# Altium PCB Heater 020305.PcbDoc
Units mm, origin at the board's own origin, x right, y up, seen from the top; angles counter-clockwise.
Board outline 154.43 x 102.87 mm, 2 copper layers (Top Layer, Bottom Layer); 49 components, 12 nets, 102 pads, 137 vias.
Unrouted connection lines stored in the file: 1.
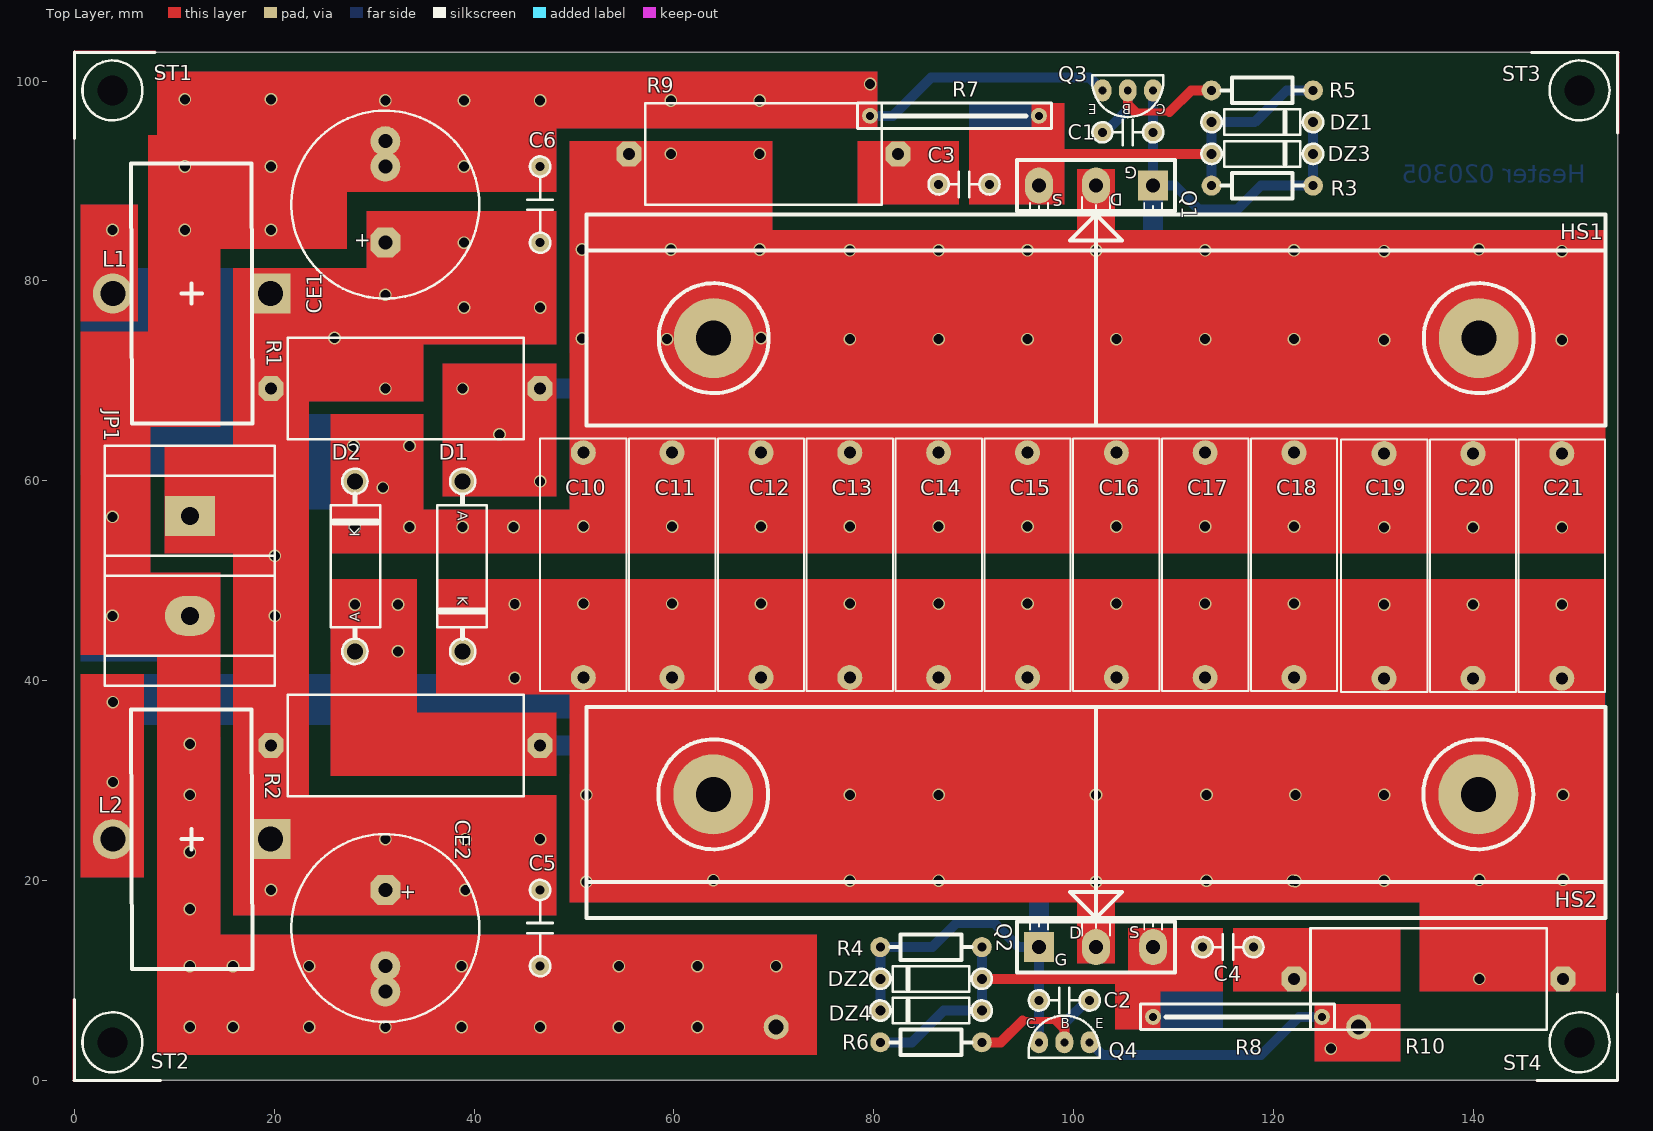
[diagram p0: Top Layer view]
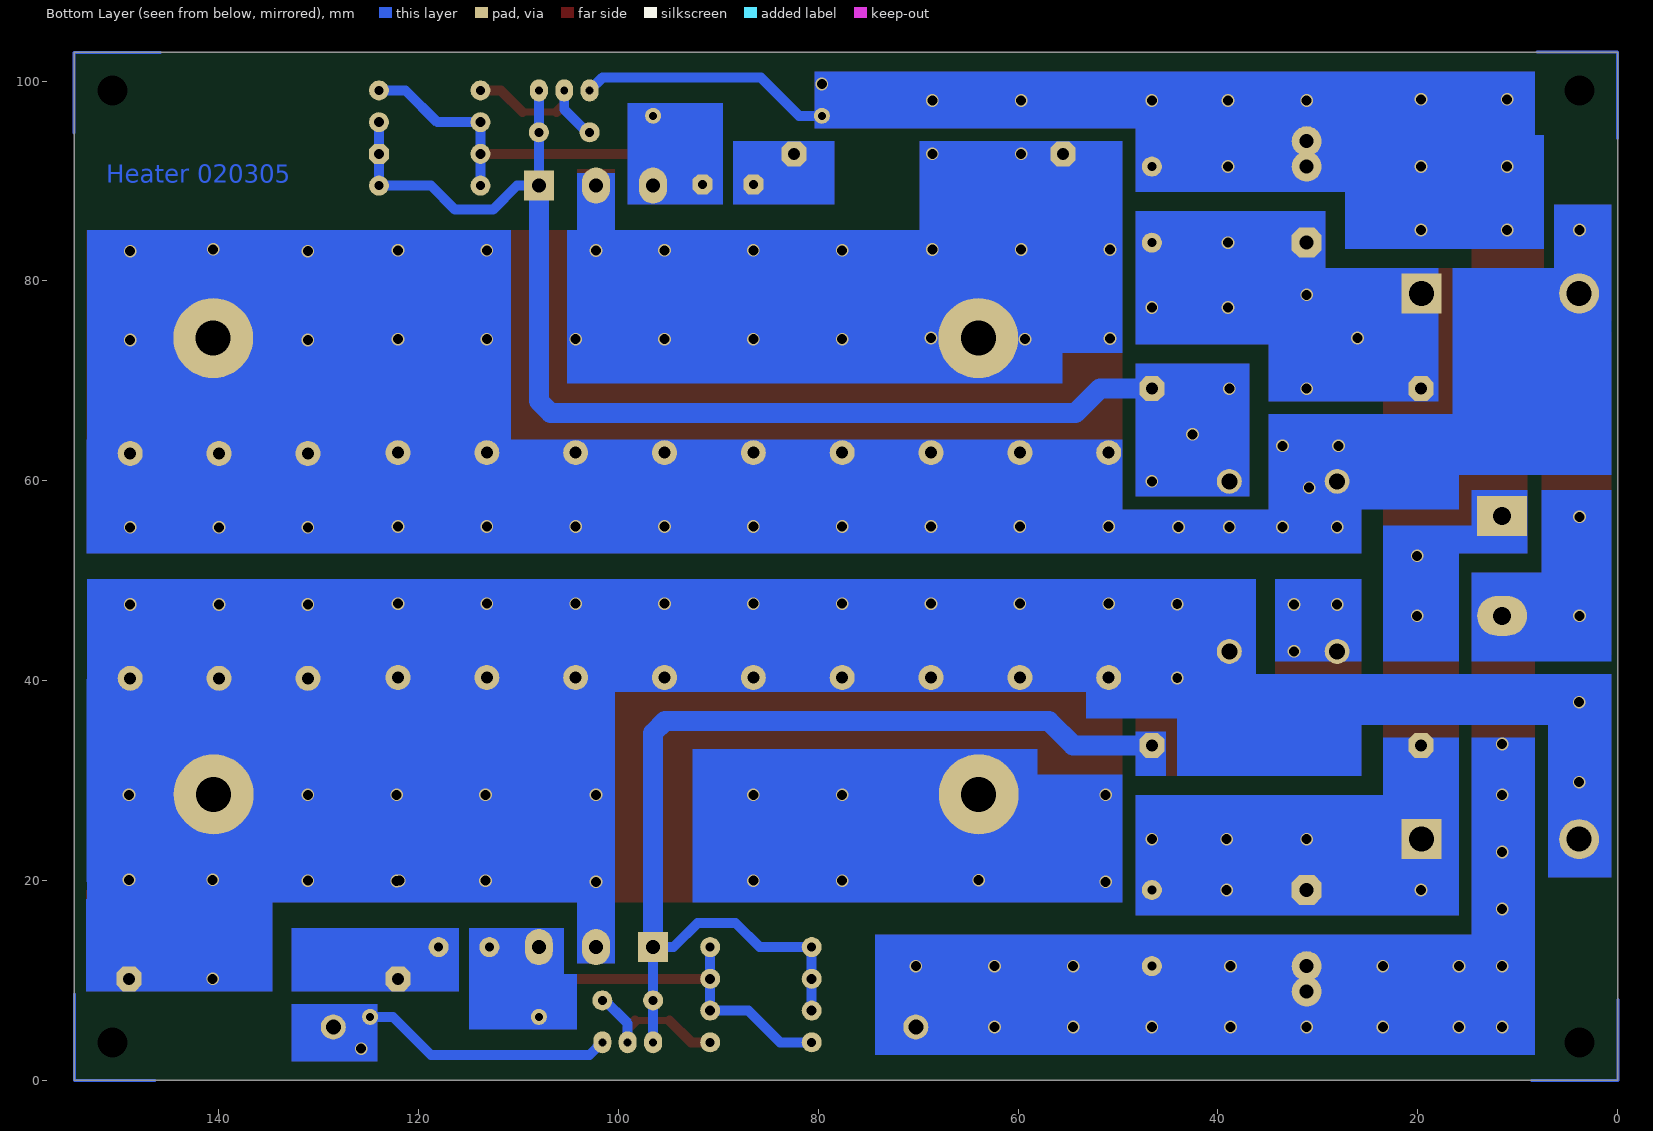
[diagram p1: Bottom Layer view, seen from below]

## Layer stack, top to bottom
Top Solder: solder mask 0.0102, Solder Resist, Dk 3.5
Top Layer: signal copper 0.0356
Dielectric1: dielectric 0.32, FR-4, Dk 4.8
Bottom Layer: signal copper 0.0356
Bottom Solder: solder mask 0.0102, Solder Resist, Dk 3.5

## Board outline
0,0 0,102.87 154.432,102.87 154.432,0

## Design rules (kind name [scope] priority, off if disabled: settings)
Clearance [All] p1: gap=0.3 ignorepadtopadclearanceinfootprint=FALSE
ComponentClearance [All] p1 off: gap=0.254 collisioncheckmode=3 verticalgap=0.254 showdistances=FALSE
PolygonConnect [All] p1: connectstyle=Relief reliefconductorwidth=0.254 reliefentries=4 polygonreliefangle="90 Angle" airgapwidth=0.254
RoutingVias [All] p1: holewidth=0.711 width=1.27 viastyle="Through Hole" minholewidth=0.711 minwidth=1.27 maxholewidth=0.711 maxwidth=1.27
SilkToSolderMaskClearance SilkscreenOverComponentPads [IsPad] p1: minsilkscreentomaskgap=0.254 clearancetoexposedcopper=TRUE
SolderMaskExpansion [All] p1: expansion=0.102 istentingtop=FALSE
UnRoutedNet [All] p1: checkbadconnections=TRUE
Width [All] p1: maxlimit=3 minlimit=0.3 preferedwidth=0.7 minimp=50.000000 maximp=50.000000 favimp=50.000000
27 further rules are at their usual default settings.

## Components (designator, comment, footprint, x,y, rotation, side; value= is the part's Value field where it differs from the comment)
C1 "2N2" C2P#1 102.87,94.869 r0 top
C2 "2N2" C2P#1 101.6,8.001 r180 top
C3 "2N2" C2P#2 86.487,89.662 r0 top locked
C4 "2N2" C2P#1 117.983,13.335 r180 top locked
C5 "1M/63" C3P 46.609,19.05 r270 top
C6 "1M/63" C3P 46.609,83.82 r90 top
C10 "100N/630V" CV25-8-22 50.927,51.562 r90 top locked
C11 "100N/630V" CV25-8-22 59.817,51.562 r90 top locked
C12 "100N/630V" CV25-8-22 68.707,51.562 r90 top locked
C13 "100N/630V" CV25-8-22 77.597,51.562 r90 top locked
C14 "100N/630V" CV25-8-22 86.487,51.562 r90 top locked
C15 "100N/630V" CV25-8-22 95.377,51.562 r90 top locked
C16 "100N/630V" CV25-8-22 104.267,51.562 r90 top locked
C17 "100N/630V" CV25-8-22 113.157,51.562 r90 top locked
C18 "100N/630V" CV25-8-22 122.047,51.562 r90 top locked
C19 "100N/630V" CV25-8-22 131.064,51.486 r90 top locked
C20 "100N/630V" CV25-8-22 139.954,51.486 r90 top locked
C21 "100N/630V" CV25-8-22 148.844,51.486 r90 top locked
CE1 "4700M/50V" CAP3P 31.115,87.63 r180 top locked
CE2 "4700M/50V" CAP3P 31.115,15.24 r0 top locked
D1 "UF5408" D54 38.862,51.435 r270 top locked
D2 "UF5408" D54 28.067,51.435 r90 top locked
DZ1 "16V" D4P#1 113.792,95.885 r180 top locked
DZ2 "16V" D4P#1 90.805,10.16 r0 top
DZ3 "16V" D4P#2 113.792,92.71 r180 top locked
DZ4 "16V" D4P#1 90.805,6.985 r0 top
HS1 "5-12V/5Amp" HS1 102.258,74.271 r180 top locked
HS2 "5-12V/5Amp" HS1 102.212,28.626 r0 top locked
JP1 "12-24V/5-10Amp" DG55X2 11.557,56.482 r270 top locked
L1 "100uH/10A" INDU2511 11.747,78.74 r270 top locked
L2 "100uH/10A" INDU2511 11.747,24.13 r270 top locked
Q1 "IRFP4568" TO247-MOSPIN 102.235,86.995 r180 top locked
Q2 "IRFP4568" TO247-MOSPIN 102.235,15.875 r0 top locked
Q3 "BC456B" CBE-BC546 102.87,99.06 r270 top locked
Q4 "BC456B" CBE-BC546 101.6,3.81 r90 top locked
R1 "470R/5W" W5 33.147,69.215 r0 top locked
R2 "470R/5W" W5 33.147,33.528 r0 top locked
R3 "10K" R4P 123.952,89.535 r270 top locked
R4 "10K" R4P 90.805,13.335 r270 top
R5 "2K2%" R4P 123.952,99.06 r270 top locked
R6 "2K2%" R4P 80.645,3.81 r90 top
R7 "50mR" WIRE1m5 96.52,96.52 r180 top locked
R8 "50mR" WIRE1m5 107.95,6.35 r0 top locked
R9 "220R" W5 68.961,92.71 r180 top locked
R10 "220R" W5 135.509,10.16 r180 top
ST1 "STUD" CORNER 0,102.87 r0 top
ST2 "STUD" CORNER 0,0 r90 top
ST3 "STUD" CORNER 154.432,102.87 r270 top locked
ST4 "STUD" CORNER 154.432,0 r180 top locked

## Footprints (in the part's own frame and the unit in brackets; to place one, negate y for a bottom-side part, rotate by r counter-clockwise, add the part's x,y. Pads: shape width x height; smd on the part's side, far side on the other; paste and mask are expansions set on the pad)
C2P#1 [mm]
  round 2 hole 0.9: 1(0,0) 2(5.08,0)
  silkscreen extent -1.01,-1.27 6.1,1.27
C2P#2 [mm]
  oct 2x2 hole 0.9: 1(0,0) 2(5.08,0)
  silkscreen extent -1.01,-1.27 6.1,1.27
C3P [mm]
  round 2 hole 0.9: 1(0,0) 2(7.62,0)
  silkscreen extent -1.02,-1.27 8.64,1.27
CAP3P [mm]
  oct 3x3 hole 1.4: 1(0,3.81)
  round 3 hole 1.4: 2(0,-3.81)
  silkscreen extent -9.4,-9.4 9.4,9.4
CBE-BC546 [mm]
  oval 2.2x1.8 hole 0.8: 1(0,2.54) 2(0,0) 3(0,5.08)
  silkscreen extent -1.52,-1.02 2.67,6.1
CORNER [mm]
  round 2 hole 3: 1(3.81,-3.81)
  Multi-Layer lines w0.3: 0,-8.623 0,0.013 8.09,0.013
  silkscreen extent 0,-8.62 8.09,0.01
CV25-8-22 [mm]
  round 2.5 hole 1.2: 1(11.252,0) 2(-11.252,0)
  silkscreen extent -12.6,-4.32 12.65,4.32
D4P#1 [mm]
  round 2 hole 1: 1(0,0) 2(-10.16,0)
  silkscreen extent -11.18,-1.27 1.01,1.27
D4P#2 [mm]
  round 2 hole 1: 1(0,0)
  oct 2x2 hole 1: 2(-10.16,0)
  silkscreen extent -11.18,-1.27 1.01,1.27
D54 [mm]
  round 2.5 hole 1.6: 1(-8.509,0) 2(8.509,0)
  silkscreen extent -9.78,-2.54 9.78,2.41
DG55X2 [mm]
  rect 4x5 hole 1.8: 1(0,0)
  oval 4x5 hole 1.8: 2(10,0)
  silkscreen extent -7,-8.5 17,8.5
HS1 [mm]
  round 8 hole 3.5: 1(-38.278,0) 2(38.278,0)
  silkscreen extent -50.98,-12.37 51.02,8.74
INDU2511 [mm]
  rect 4x4 hole 2.5: 1(0,7.899)
  round 4 hole 2.5: 2(0,-7.899)
  silkscreen extent -13,-6.08 13,6.08
R4P [mm]
  round 2 hole 0.9: 1(0,0) 2(0,-10.16)
  silkscreen extent -1.27,-9.14 1.27,-1.02
TO247-MOSPIN [mm]
  rect 3x3 hole 1.4: 1(-5.715,-2.54)
  oval 2.8x3.6 hole 1.4: 2(0,-2.54) 3(5.715,-2.54)
  silkscreen extent -7.9,-5.08 7.9,0.01
W5 [mm]
  oct 2.5x2.5 hole 1.2: 1(-13.462,0) 2(13.462,0)
  silkscreen extent -11.81,-5.08 11.81,5.08
WIRE1m5 [mm]
  round 1.6 hole 0.8: 1(0,0) 2(16.891,0)
  silkscreen extent -1.27,-1.27 18.16,1.27

## Part data
C1 C2 C3 C4 C5 C6 C10 C11 C12 C13 C14 C15 C16 C17 C18 C19 C20 C21: library part C
CE1 CE2: library part E
D1 D2: library part D
DZ1 DZ2 DZ3 DZ4: library part DZ
HS1 HS2 JP1: library part "Header 2", "Header, 2-Pin", LatestRevisionDate=17-Jul-2002, LatestRevisionNote="Re-released for DXP Platform.", Publisher="Altium Limited"
L1 L2: library part INDUCTOR
Q1 Q2: library part "MOSFET N"
Q3 Q4: library part N
R1 R2 R3 R4 R5 R6 R7 R8 R9 R10: library part R

## Free pads (board coordinates)
  round 3 hole 1.4: 2(31.115,8.89) 2(31.115,93.98)
  round 2.5 hole 1.5: 2(70.231,5.334) 2(128.524,5.334)

## Via types
v1: diameter 1.27, hole 1, Top Layer to Bottom Layer, 137 vias

## Nets (pads, with @x,y where several pads share a name; then routed paths per layer and width w, separated by ;. In a path a pad name is that pad's centre, name@x,y a point inside that pad or via, vN(x,y) a via of type N, cw(c..) or ccw(c..) an arc to the next point about the centre after c; other vN are vias at no path point)
NetC1_1: C1.1 Q3.1 R5.2 | length 16.4
  Top Layer w0.7: 106.164,96.901 109.601,96.901
  Top Layer w1: Q3.1 105.41,97.655 106.164,96.901 ; 109.601,96.901 111.76,99.06 R5.2@113.665,99.06
  Bottom Layer w1: C1.1@102.87,94.615 105.41,97.155 Q3.1
NetC1_2: C1.2 D1.1 DZ1.2 DZ3.2 Q1.1 Q3.3 R1.2 R3.1 | length 118.3
  Bottom Layer w1: Q3.3 107.95,94.615 Q1.1 110.128,89.535 112.541,87.122 116.332,87.122 118.745,89.535 R3.1 DZ3.2 DZ1.2
  Bottom Layer w2: R1.2 51.816,69.215 54.229,66.802 106.778,66.802 107.95,67.974 Q1.1
  other v1: 46.609,59.944 42.545,64.643 38.862,69.215
NetC2_1: C2.1 Q4.1 R6.2 | length 16.4
  Top Layer w0.7: 94.869,5.969 98.306,5.969
  Top Layer w1: R6.2 92.71,3.81 94.869,5.969 ; 98.306,5.969 99.06,5.215 Q4.1
  Bottom Layer w1: Q4.1 99.06,5.715 C2.1@101.6,8.255
NetC2_2: C2.2 D2.1 DZ2.2 DZ4.2 Q2.1 Q4.3 R2.2 R4.2 | length 106.6
  Bottom Layer w1: DZ4.2 DZ2.2 R4.2 85.852,13.335 88.265,15.748 92.056,15.748 94.469,13.335 Q2.1 96.52,8.255 Q4.3
  Bottom Layer w2: R2.2 54.483,33.528 56.896,35.941 95.348,35.941 96.52,34.769 Q2.1
  other v1: 32.385,42.926 28.067,47.625 32.385,47.625
NetC3_1: C3.1 R9.1
NetC3_2: C3.2 DZ1.1 DZ3.1 Q1.3 R3.2 R5.1 R7.1 | length 33.8
  Top Layer w1: 97.79,92.71 DZ3.1
  Bottom Layer w1: R3.2 DZ3.1 DZ1.1 118.11,95.885 121.285,99.06 R5.1
NetC4_1: C4.1 R10.2
NetC4_2: C4.2 DZ2.1 DZ4.1 Q2.3 R4.1 R6.1 R8.1 | length 35
  Top Layer w1: DZ2.1 107.95,10.16
  Bottom Layer w1: R6.1 83.82,3.81 86.995,6.985 DZ4.1 DZ2.1 R4.1
NetC5_1: C5.1 C6.1 CE1.1 CE2.1 JP1.1 L1.1 L2.1 R1.1 R2.1
  other v1: 19.685,19.05 39.116,19.05 31.115,24.13 39.116,24.13 46.609,24.13 20.066,46.482 20.057,52.482 31.115,69.215 26.035,74.295 38.989,77.343 46.609,77.343 31.115,78.613 38.989,83.82
NetC5_2: C5.2 C6.2 CE1.2 CE2.2 JP1.2 pad.2 Q3.2 Q4.2 R7.2 R8.2 | length 50.7
  Bottom Layer w1: R7.2 81.915,96.52 85.725,100.33 101.6,100.33 Q3.2 ; Q4.2 101.616,3.81 102.886,2.54 118.745,2.54 122.555,6.35 R8.2
  other v1: 125.73,3.175 11.557,5.334 15.875,5.334 23.495,5.334 31.115,5.334 38.735,5.334 46.609,5.334 54.483,5.334 62.357,5.334 11.557,11.43 15.875,11.43 23.495,11.43 38.735,11.43 54.483,11.43 62.357,11.43 70.231,11.43 11.557,17.145 11.557,22.86 11.557,28.575 11.557,33.655 3.81,46.482 3.81,56.388 11.049,85.09 19.685,85.09 11.049,91.44 19.685,91.44 38.989,91.44 31.115,98.044 38.989,98.044 46.609,98.044 59.69,98.044 68.58,98.044 11.049,98.171 19.685,98.171 79.629,99.695
NetC10_1: C10.1 C11.1 C12.1 C13.1 C14.1 C15.1 C16.1 C17.1 C18.1 C19.1 C20.1 C21.1 D2.2 HS1.1 HS1.2 L1.2 Q1.2 R9.2 | length 0
  Top Layer w1.8: v1@102.233,83.034 v1@102.235,83.037
  other v1: 131.064,55.347 139.954,55.347 148.844,55.347 28.067,55.372 33.528,55.372 38.862,55.372 43.942,55.372 50.927,55.423 59.817,55.423 68.707,55.423 77.597,55.423 86.487,55.423 95.377,55.423 104.267,55.423 113.157,55.423 122.047,55.423 30.861,59.309 27.94,63.5 33.528,63.5 131.064,74.092 148.844,74.092 59.309,74.168 77.597,74.168 86.487,74.168 86.487,74.168 95.377,74.168 95.377,74.168 104.267,74.168 113.157,74.168 122.047,74.168 50.8,74.244 68.707,74.295 131.066,82.982 148.846,82.982 102.235,83.034 77.597,83.058 86.487,83.058 95.377,83.058 113.159,83.058 122.049,83.058 50.8,83.134 59.69,83.134 68.58,83.134 140.538,83.161 3.81,85.09 59.69,92.71 68.58,92.71
NetC10_2: C10.2 C11.2 C12.2 C13.2 C14.2 C15.2 C16.2 C17.2 C18.2 C19.2 C20.2 C21.2 D1.2 HS2.1 HS2.2 L2.2 Q2.2 R10.1
  other v1: 140.589,10.16 51.235,19.863 102.237,19.863 122.186,19.945 77.597,19.99 86.487,19.99 113.284,19.99 121.92,19.99 131.064,19.99 63.934,20.041 140.589,20.066 148.971,20.066 51.235,28.575 77.597,28.575 86.487,28.575 102.235,28.575 113.284,28.575 122.174,28.575 131.064,28.575 148.971,28.575 3.848,29.845 3.848,37.846 44.069,40.259 131.064,47.625 139.954,47.625 148.844,47.625 44.069,47.65 50.927,47.701 59.817,47.701 68.707,47.701 77.597,47.701 86.487,47.701 95.377,47.701 104.267,47.701 113.157,47.701 122.047,47.701
pads on no net: ST1.1 ST2.1 ST3.1 ST4.1

## Other copper
Top Layer:
  rectangle net NetC10_2: 36.195,38.608 51.181,50.165
  rectangle net NetC3_2: 95.758,93.345 99.06,97.79
  rectangle net NetC5_2: 124.079,1.905 132.715,7.62
  region net NetC10_1: 104.14,91.186 100.33,91.186 100.33,84.709 104.14,84.709
  rectangle net NetC10_2: 100.33,11.684 104.14,18.161
  rectangle net NetC5_1: 22.733,67.945 34.925,74.803
  rectangle net NetC10_1: 0.635,75.946 6.35,87.63
  rectangle net NetC5_2: 13.843,83.185 27.305,90.043
  rectangle net NetC5_2: 7.366,65.405 14.605,94.615
  rectangle net NetC5_2: 0.635,50.165 7.62,74.93
  rectangle net NetC5_2: 0.635,42.545 14.605,50.8
  rectangle net NetC5_1: 9.017,52.705 16.383,63.5
  rectangle net NetC10_2: 0.635,20.32 6.985,40.64
  rectangle net NetC5_2: 13.97,2.54 74.295,14.605
  rectangle net NetC5_2: 8.255,2.54 14.605,50.482
  rectangle net NetC2_2: 33.02,30.48 48.26,36.83
  rectangle net NetC2_2: 25.654,30.48 34.29,50.165
  rectangle net NetC5_1: 22.86,16.51 48.26,28.575
  rectangle net NetC5_1: 15.875,16.51 23.495,53.34
  rectangle net NetC10_1: 25.654,56.261 34.925,66.675
  rectangle net NetC10_1: 25.654,52.705 50.038,57.15
  rectangle net NetC1_2: 36.83,58.42 48.26,71.755
  rectangle net NetC5_1: 23.241,74.295 30.734,81.28
  rectangle net NetC5_1: 29.21,73.66 48.26,86.995
  rectangle net NetC5_1: 15.875,52.705 23.495,81.28
  region net NetC10_2: 153.162,50.165 49.53,50.165 49.53,17.78 153.162,17.78
  region net NetC10_2: 153.289,19.05 134.62,19.05 134.62,8.89 153.289,8.89
  region net NetC4_1: 132.715,15.24 115.951,15.24 115.951,8.89 132.715,8.89
  region net NetC4_2: 114.935,15.24 105.41,15.24 105.41,8.89 114.935,8.89
  region net NetC4_2: 108.712,10.033 104.14,10.033 104.14,5.08 108.712,5.08
  rectangle net NetC5_2: 8.255,88.9 48.26,100.965
  rectangle net NetC5_2: 46.99,95.25 80.391,100.965
  rectangle net NetC10_1: 49.53,83.82 69.85,93.98
  rectangle net NetC3_1: 78.359,87.63 88.519,93.98
  rectangle net NetC3_2: 89.535,87.63 99.06,95.25
  rectangle net NetC10_1: 49.53,52.705 153.235,85.09
Bottom Layer:
  rectangle net NetC10_2: 49.53,17.78 58.42,30.607
  rectangle net NetC10_2: 36.195,35.56 44.069,50.165
  rectangle net NetC2_2: 45.212,30.48 48.26,34.925
  rectangle net NetC10_1: 0.635,80.899 6.35,87.63
  rectangle net NetC10_1: 33.655,52.705 50.038,57.15
  rectangle net NetC10_1: 25.654,52.705 34.29,57.531
  rectangle net NetC2_2: 25.654,41.91 34.29,50.165
  rectangle net NetC10_2: 25.654,30.48 44.069,36.195
  rectangle net NetC10_2: 43.688,36.195 53.213,39.243
  rectangle net NetC5_2: 124.079,1.905 132.715,7.62
  rectangle net NetC4_2: 104.14,5.08 105.664,10.668
  rectangle net NetC4_2: 105.41,5.08 114.935,9.271
  rectangle net NetC4_2: 105.41,8.89 114.935,15.24
  rectangle net NetC4_1: 115.951,8.89 132.715,15.24
  rectangle net NetC10_2: 134.62,8.89 153.289,18.161
  rectangle net NetC10_1: 100.33,84.709 104.14,90.805
  rectangle net NetC10_2: 100.33,11.684 104.14,18.161
  rectangle net NetC10_1: 49.53,72.771 56.134,83.034
  rectangle net NetC10_1: 49.53,82.55 69.85,93.98
  rectangle net NetC3_2: 89.535,87.63 95.885,93.98
  rectangle net NetC3_2: 89.535,87.63 99.06,97.79
  rectangle net NetC5_2: 8.255,13.97 14.605,34.29
  rectangle net NetC5_2: 8.255,2.54 74.295,14.605
  rectangle net NetC5_1: 15.875,16.51 23.495,34.29
  rectangle net NetC5_1: 22.606,16.51 48.26,28.575
  rectangle net NetC5_1: 15.875,41.91 23.495,53.34
  rectangle net NetC5_1: 14.097,52.705 23.495,55.499
  rectangle net NetC5_1: 9.017,52.705 14.605,59.055
  rectangle net NetC5_2: 0.635,50.482 7.62,59.055
  rectangle net NetC5_2: 0.635,41.91 14.605,50.8
  rectangle net NetC5_1: 17.907,67.945 34.925,74.803
  rectangle net NetC5_1: 17.907,74.295 31.115,81.28
  rectangle net NetC5_1: 29.21,73.66 48.26,86.995
  rectangle net NetC5_2: 7.366,89.281 8.89,94.615
  rectangle net NetC5_2: 7.366,83.185 27.305,89.662
  rectangle net NetC5_2: 8.255,88.9 48.26,95.504
  rectangle net NetC5_2: 8.255,95.25 80.391,100.965
  rectangle net NetC3_1: 78.359,87.63 88.519,93.98
  rectangle net NetC10_2: 110.79,19.839 153.208,40.159
  rectangle net NetC10_1: 55.545,69.75 105.156,85.09
  rectangle net NetC10_2: 58.039,17.78 92.583,33.147
  rectangle net NetC10_1: 110.744,62.738 153.162,85.09
  rectangle net NetC10_2: 100.33,17.78 153.162,39.37
  rectangle net NetC10_1: 49.53,52.705 153.235,64.135
  rectangle net NetC10_2: 42.037,38.862 153.162,50.165
  rectangle net NetC10_1: 0.635,60.579 16.51,81.28
  rectangle net NetC10_1: 15.875,57.15 34.925,66.675
  rectangle net NetC10_2: 0.635,20.32 6.985,36.195
  rectangle net NetC10_2: 0.635,35.56 36.83,40.64
  rectangle net NetC1_2: 36.83,58.42 48.26,71.755
  text "Heater 020305" at 151.238,89.808 h1.8

## Silkscreen, mask and mechanical layers (free items; w line width, h text height)
Top Overlay:
  circle w0.4: c63.934,28.626 r5.5
  circle w0.4: c140.49,28.626 r5.5
  circle w0.4: c140.536,74.271 r5.5
  circle w0.4: c63.98,74.271 r5.5
Mechanical 1:
  the board outline again, w0.4

## Text inside footprints (layer, text, board x,y; h text height)
CE1: Top Overlay "+" at 29.464,83.185 h1.5 r90
CE2: Top Overlay "+" at 32.766,19.685 h1.5 r270
D1: Top Overlay "A" at 38.379,56.972 h1.02 r270; Top Overlay "K" at 38.379,48.463 h1.02 r270
D2: Top Overlay "A" at 28.55,45.898 h1.02 r90; Top Overlay "K" at 28.55,54.407 h1.02 r90
Q1: Top Overlay "D" at 104.907,88.702 h1.2 r180; Top Overlay "G" at 106.38,91.419 h1.2 r180; Top Overlay "S" at 98.887,88.651 h1.2 r180
Q2: Top Overlay "D" at 99.563,14.168 h1.2; Top Overlay "G" at 98.09,11.451 h1.2; Top Overlay "S" at 105.583,14.219 h1.2
Q3: Top Overlay "B" at 105.743,97.655 h1 r180; Top Overlay "E" at 102.29,97.655 h1 r180; Top Overlay "C" at 109.196,97.655 h1 r180
Q4: Top Overlay "B" at 98.727,5.215 h1; Top Overlay "E" at 102.18,5.215 h1; Top Overlay "C" at 95.274,5.215 h1